# Altium PCB red.PcbDoc
Units mm, origin at the board's own origin, x right, y up, seen from the top; angles counter-clockwise.
Board outline 54 x 12.05 mm, 2 copper layers (Top Layer, Bottom Layer), stack 2.254 mm thick; 5 components, 4 nets, 16 pads, 155 vias.
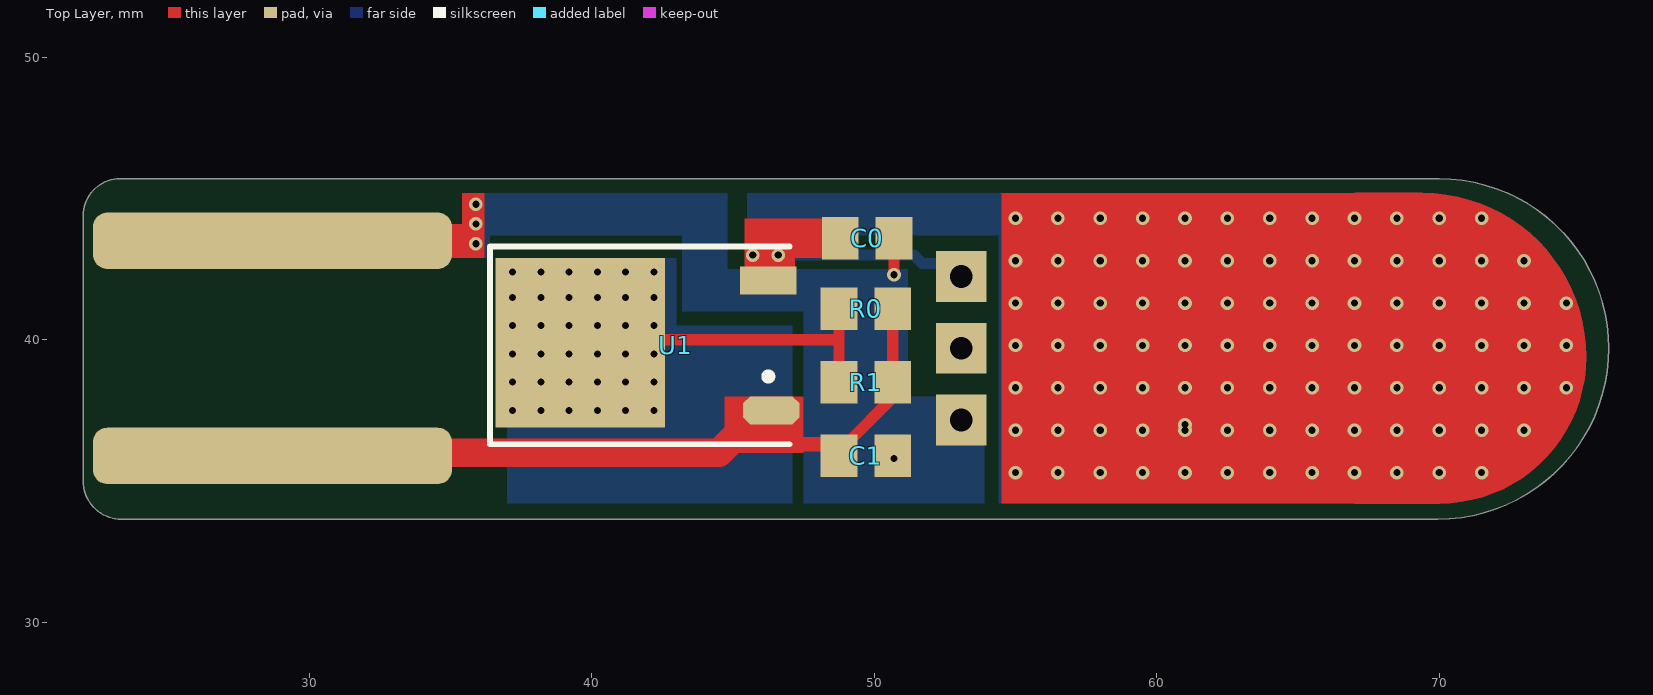
[diagram p0: Top Layer view]
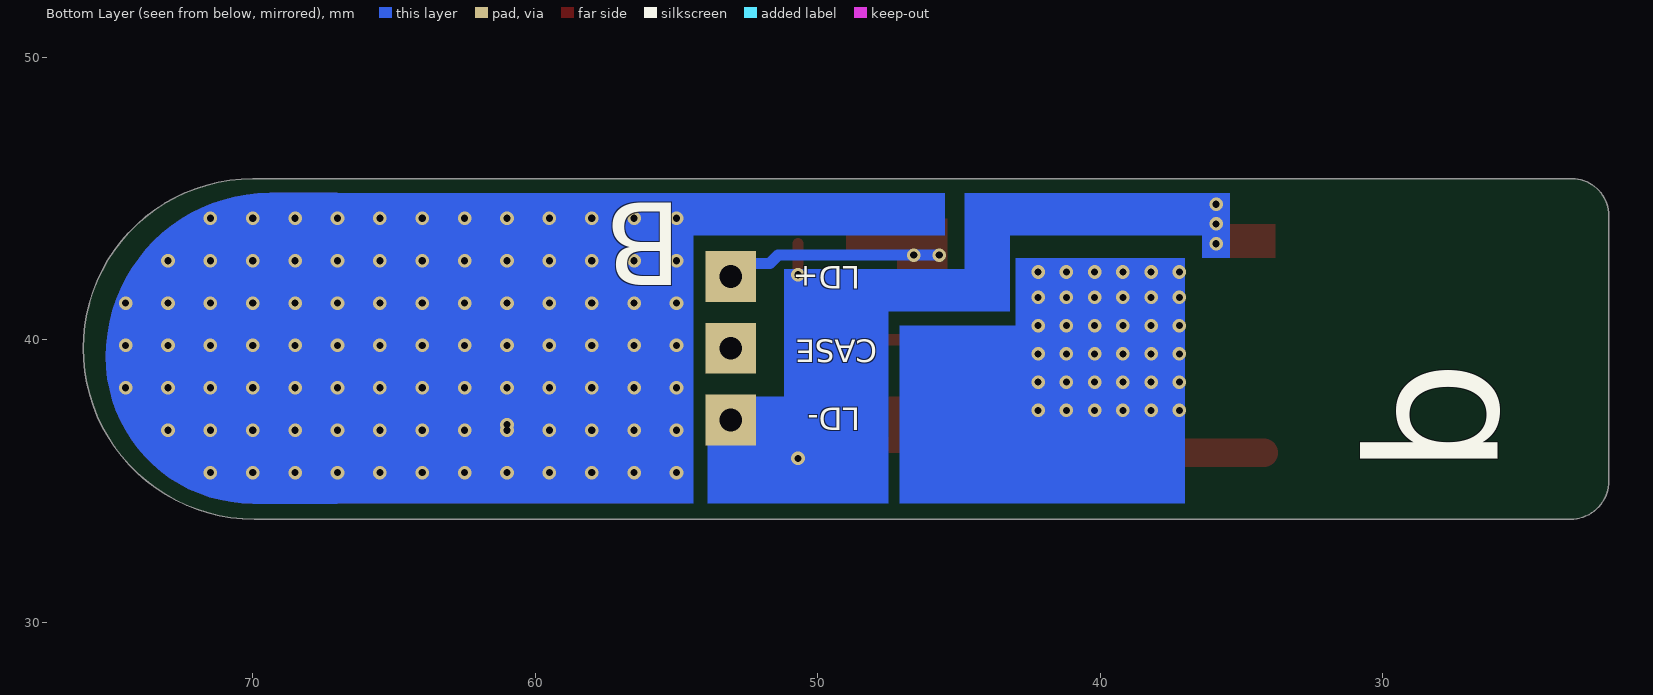
[diagram p1: Bottom Layer view, seen from below]
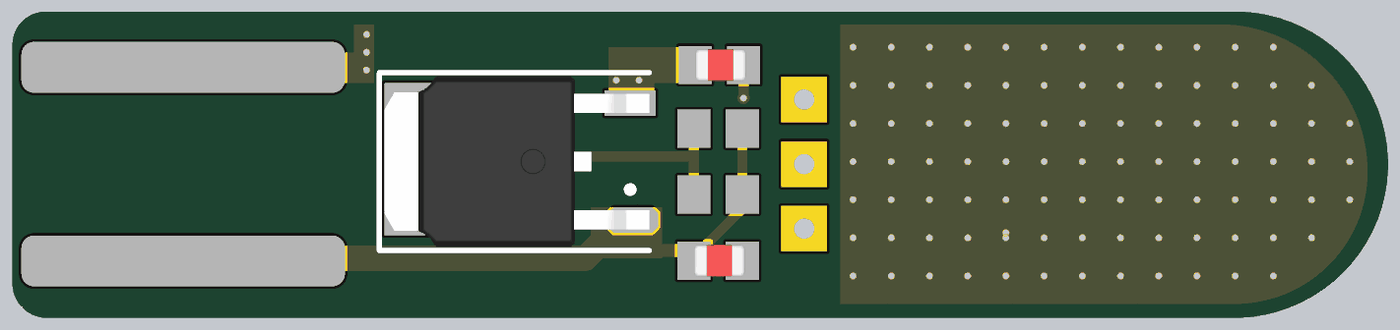
[diagram p2: 3D render of the assembled board from above, using the file's embedded part models]

## Layer stack, top to bottom
Top Solder: solder mask 0.0102, Solder Resist, Dk 3.5
Top Layer: signal copper 0.127
Dielectric 1: core 2, FR-4, Dk 4.2
Bottom Layer: signal copper 0.127
Bottom Solder: solder mask 0.0102, Solder Resist, Dk 3.5

## Board outline
23.3,45.7 70,45.7 cw(c70,39.7) 76,39.7 cw(c69.95,39.7) 69.95,33.65 23.35,33.65 cw(c23.35,35) 22,35 22,44.4 cw(c23.3,44.4)

## Design rules (kind name [scope] priority, off if disabled: settings)
Clearance [All] p1: gap=0.1 ignorepadtopadclearanceinfootprint=FALSE except(0: Arc-Hole Track-Hole SMDPad-Hole THPad-Hole Via-Hole Fill-Hole Poly-Hole Region-Hole Text-Hole; 0.15: Arc-Fill Arc-Poly Arc-Region Track-Fill Track-Poly Track-Region Fill-Fill Fill-Poly Fill-Region Poly-Poly Poly-Region Region-Region)
DiffPairsRouting [All] p1: maxlimit=0.254 minlimit=0.254 mostfreqgap=0.254 toplayer_minwidth=0.381 toplayer_maxwidth=1 toplayer_prefwidth=0.381 bottomlayer_minwidth=0.381 bottomlayer_maxwidth=1 bottomlayer_prefwidth=0.381 maxuncoupledlength=12.7
HoleSize [All] p1: absolutevalues=TRUE maxlimit=4 minlimit=0.025 maxpercent=80.000 minpercent=20.000
MinimumSolderMaskSliver [All] p1: minsoldermaskwidth=0
PolygonConnect [All] p1: thpad.connectstyle=Relief thpad.reliefconductorwidth=0.254 thpad.reliefentries=4 thpad.polygonreliefangle="90 Angle" thpad.airgapwidth=0.254 smdpad.connectstyle=Relief smdpad.reliefconductorwidth=0.254 smdpad.reliefentries=4 smdpad.polygonreliefangle="90 Angle" smdpad.airgapwidth=0.254 via.connectstyle=Direct via.reliefconductorwidth=0.254 via.reliefentries=4 via.polygonreliefangle="90 Angle" via.airgapwidth=0.254
RoutingVias [All] p1: holewidth=0.711 width=1.27 viastyle="Through Hole" minholewidth=0.711 minwidth=1.27 maxholewidth=0.711 maxwidth=1.27
SilkToSolderMaskClearance [IsPad] p1: minsilkscreentomaskgap=0 clearancetoexposedcopper=TRUE
SolderMaskExpansion [All] p1: expansion=0.102
Width [All] p1: maxlimit=1 minlimit=0.15 preferedwidth=0.2 minimp=50.000000 maximp=50.000000 favimp=50.000000
26 further rules are at their usual default settings.

## Components (designator, comment, footprint, x,y, rotation, side; value= is the part's Value field where it differs from the comment)
C0 "CL21A106KAYNNNE" C_0805 49.75,43.6 r180 top value=10uF
C1 "CL21A106KAYNNNE" C_0805 49.7,35.9 r180 top value=10uF
R0 "0805W8F330JT5E" R_0805 49.7,41.1 r0 top value=33R
R1 "0805W8F330JT5E" R_0805 49.7,38.5 r0 top value=33R
U1 "LM317AG-TN3-R" TO-252AA 39.6,39.9 r180 top

## Footprints (in the part's own frame and the unit in brackets; to place one, negate y for a bottom-side part, rotate by r counter-clockwise, add the part's x,y. Pads: shape width x height; smd on the part's side, far side on the other; paste and mask are expansions set on the pad)
C_0805 [mm] "Chip Capacitor; Body 2.0 x 1.2 mm (LxW typ)"
  rect 1.3x1.5 smd: 1(-0.95,0) 2(0.95,0)
  body extent -1.05,-0.62 0.95,0.62, height 0.78
R_0805 [mm] "Body 2.0 x 1.2 mm (LxW typ)"
  rect 1.3x1.5 smd: 1(-0.95,0) 2(0.95,0)
  body extent -1.27,-0.64 1.27,0.64, height 1
TO-252AA [mm] "DPAK"
  oct 2x1 smd: 1(-6.75,2.4)
  rect 6x6 smd: 2(0,0)
  rect 2x1 smd: 3(-6.65,-2.2)
  silkscreen extent -7.4,-3.4 3.2,3.6, body extent -7.41,-3.26 3.01,3.46, height 2.39

## Part data
C0 C1: "C - CAPACITOR - MLCC - 10uF - 25V - 0805", LCSC Part #=C15850, Availability=Basic, WVDC=25
R0 R1: "R - RESISTOR - SMD - 33R - 1% - 0402", JLC Availability=Basic, LCSC Part #=C17634
U1: "U - IC - ADJUSTABLE LDO", JLC Availability=Basic, LCSC Part #=C75510, VOut=ADJ

## Free pads (board coordinates)
  rrect50% 12.7x2 smd: 13(28.7,35.89) 13(28.7,43.51)
  rect 1.8x1.8 hole 0.8: 13(53.08,37.16) 13(53.08,39.7) 13(53.08,42.24)

## Via types
v1: diameter 0.48, hole 0.254, Top Layer to Bottom Layer, tented both sides, 155 vias

## Nets (pads, with @x,y where several pads share a name; then routed paths per layer and width w, separated by ;. In a path a pad name is that pad's centre, name@x,y a point inside that pad or via, vN(x,y) a via of type N, cw(c..) or ccw(c..) an arc to the next point about the centre after c; other vN are vias at no path point)
GND: C0.1 C1.1 pad.13@28.7,43.51 pad.13@53.08,37.16 | length 13.4
  Top Layer w0.4: C1.1@50.65,35.6 50.7,35.65 v1(50.7,35.8) ; v1(50.7,42.3) C0.1@50.7,43.4
  Bottom Layer w0.4: 43.7,42 50.7,42 ; 50.7,37.2 50.7,42 ; v1(50.7,42.3) 50.7,42
  other v1: 35.9,43.4 35.9,44.1 35.9,44.8
NetC1_2: C1.2 pad.13@28.7,35.89 R0.2 R1.2 U1.1 | length 20.6
  Top Layer w0.4: C1.2@49.05,36.15 49.05,36.35 50.65,37.95 50.65,38.2 R0.2@50.65,40.8 ; R0.2@50.65,40.7 50.65,40.95 R0.2@50.7,41
  Top Layer w0.5: 46.8,36.5 U1.1@46.8,37.25 ; 46.85,36.3 C1.2@48.5,36.3
  Top Layer w1: pad.13@34.2,36 44.5,36 45.7,37.2 U1.1@45.7,37.5 ; U1.1@46.7,37.5 46.8,37.4 U1.1@46.8,37.25
NetR0_1: R0.1 R1.1 U1.2 | length 9
  Top Layer w0.4: U1.2@41.7,40 48.692,40 ; R1.1@48.7,39 48.75,39.05 R0.1@48.75,41
  other v1: 37.2,37.5 38.2,37.5 39.2,37.5 40.2,37.5 41.2,37.5 42.2,37.5 37.2,38.5 38.2,38.5 39.2,38.5 40.2,38.5 41.2,38.5 42.2,38.5 37.2,39.5 38.2,39.5 39.2,39.5 40.2,39.5 41.2,39.5 42.2,39.5 37.2,40.5 38.2,40.5 39.2,40.5 40.2,40.5 41.2,40.5 42.2,40.5 37.2,41.5 38.2,41.5 39.2,41.5 40.2,41.5 41.2,41.5 42.2,41.5 37.2,42.4 38.2,42.4 39.2,42.4 40.2,42.4 41.2,42.4 42.2,42.4
V+: C0.2 pad.13@53.08,42.24 U1.3 | length 9.9
  Top Layer w0.4: U1.3@45.7,42.2 v1(45.7,43) ; U1.3@46.35,42.2 U1.3@46.7,42.2 ; v1(46.6,43) 46.7,42.5 U1.3@46.7,42.2 ; U1.3@46.7,42 U1.3@46.7,42.2
  Bottom Layer w0.4: v1(45.7,43) v1(46.6,43) 51.4,43 51.7,42.7 pad.13@52.8,42.7 ; pad.13@53,42.5 pad.13@52.8,42.7 ; pad.13@53,42.7 pad.13@52.8,42.7
copper on no net:
  other v1: 55,35.3 56.5,35.3 56.5,35.3 58,35.3 58,35.3 59.5,35.3 59.5,35.3 61,35.3 62.5,35.3 62.5,35.3 64,35.3 65.5,35.3 67,35.3 68.5,35.3 70,35.3 71.5,35.3 55,36.8 56.5,36.8 56.5,36.8 58,36.8 58,36.8 59.5,36.8 59.5,36.8 61,36.8 62.5,36.8 62.5,36.8 64,36.8 65.5,36.8 67,36.8 68.5,36.8 70,36.8 71.5,36.8 73,36.8 61,37 55,38.3 56.5,38.3 56.5,38.3 58,38.3 58,38.3 59.5,38.3 59.5,38.3 61,38.3 62.5,38.3 62.5,38.3 64,38.3 65.5,38.3 67,38.3 68.5,38.3 70,38.3 71.5,38.3 73,38.3 74.5,38.3 55,39.8 56.5,39.8 56.5,39.8 58,39.8 58,39.8 59.5,39.8 61,39.8 62.5,39.8 62.5,39.8 64,39.8 65.5,39.8 67,39.8 68.5,39.8 70,39.8 71.5,39.8 73,39.8 74.5,39.8 55,41.3 56.5,41.3 56.5,41.3 58,41.3 58,41.3 59.5,41.3 59.5,41.3 61,41.3 62.5,41.3 62.5,41.3 64,41.3 65.5,41.3 67,41.3 68.5,41.3 70,41.3 71.5,41.3 73,41.3 74.5,41.3 55,42.8 56.5,42.8 58,42.8 59.5,42.8 61,42.8 62.5,42.8 64,42.8 65.5,42.8 67,42.8 68.5,42.8 70,42.8 71.5,42.8 73,42.8 55,44.3 56.5,44.3 58,44.3 59.5,44.3 61,44.3 62.5,44.3 64,44.3 65.5,44.3 67,44.3 68.5,44.3 70,44.3 71.5,44.3

## Other copper
Top Layer:
  rectangle net V+: 46.1,42.9 49,44.3
  rectangle net V+: 45.4,42.3 47.2,44.3
  rectangle net NetC1_2: 44.7,36 47.5,38
  rectangle net GND: 33.8,42.9 36.1,44.1
  rectangle net GND: 35.4,42.9 36.2,45.2
  rectangle: 54.5,34.2 69.8,45.2
  region: 67,45.2 67,34.2 70,34.2 ccw(c70,39.4) 75.2,39.4 ccw(c69.4,39.4) 69.4,45.2
Bottom Layer:
  rectangle: 45.5,43.7 54.7,45.2
  rectangle net GND: 47.5,34.4 51.2,41.2
  rectangle net NetR0_1: 40,34.2 47.1,40.5
  rectangle net GND: 43.2,42.1 44.8,44.3
  rectangle net GND: 35.4,42.9 36.4,45.2
  rectangle net GND: 35.5,43.7 44.8,45.2
  rectangle net NetR0_1: 37,34.2 43,42.9
  rectangle: 54.4,34.2 69.8,45.2
  rectangle net GND: 43.2,41 51.2,42.5
  rectangle net GND: 47.5,34.2 53.9,38
  region: 67,45.2 67,34.2 70,34.2 ccw(c70,39.4) 75.2,39.4 ccw(c69.4,39.4) 69.4,45.2

## Silkscreen, mask and mechanical layers (free items; w line width, h text height)
Bottom Overlay:
  text "B" at 54.8,45.8 h5 r180
  text "LD+" at 48.5,42.6 h0.8 r180
  text "CASE" at 47.9,40 h0.8 r180
  text "LD-" at 48.5,37.6 h0.8 r180
  text "b" at 24.4,35.2 h8 r270
Board Outline (M30):
  the board outline again, w0.1